# Altium PCB Espectrometro_V2.PcbDoc
Units mm, origin at the board's own origin, x right, y up, seen from the top; angles counter-clockwise.
Board outline 100 x 100 mm, 2 copper layers (Top Layer, Bottom Layer); 18 components, 24 nets, 155 pads, 0 vias.
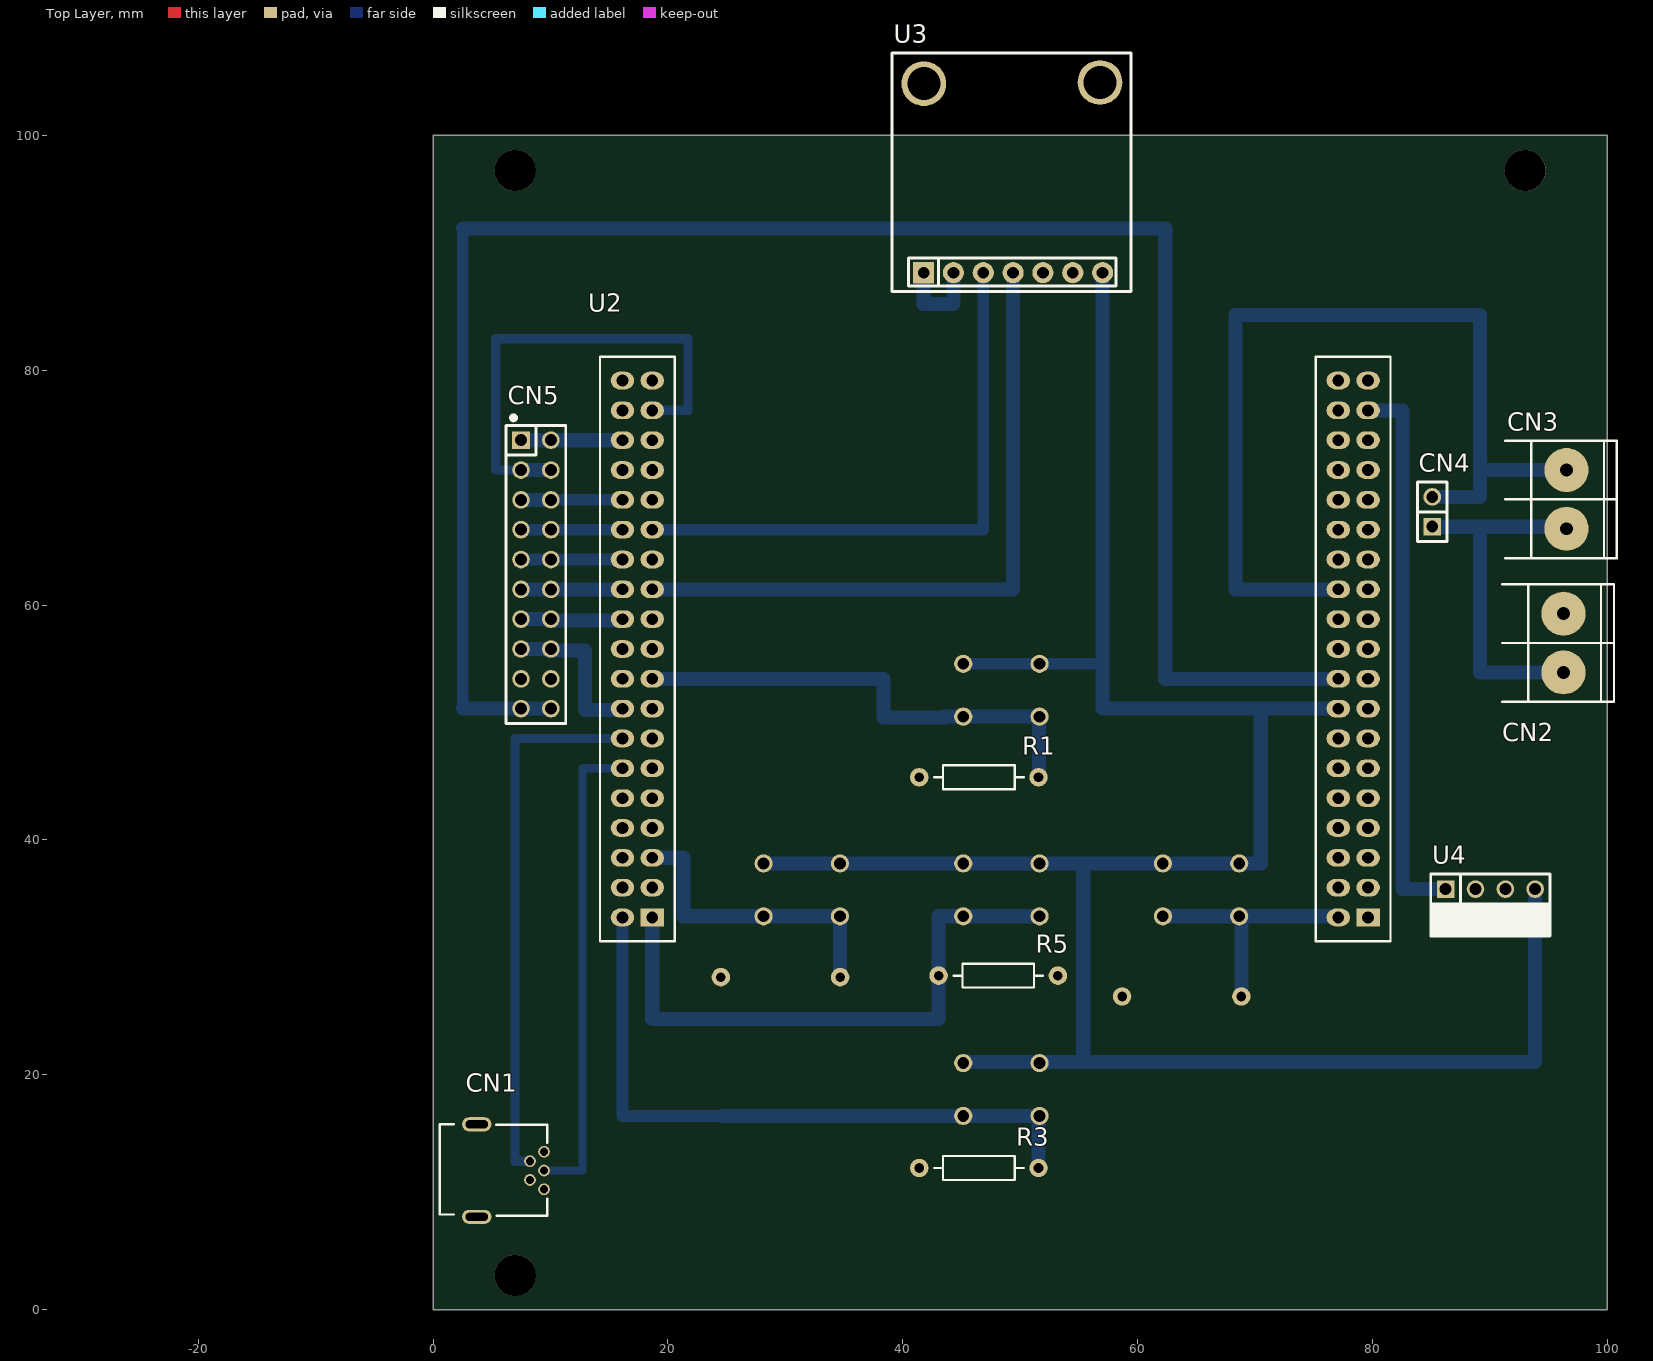
[diagram p0: Top Layer view]
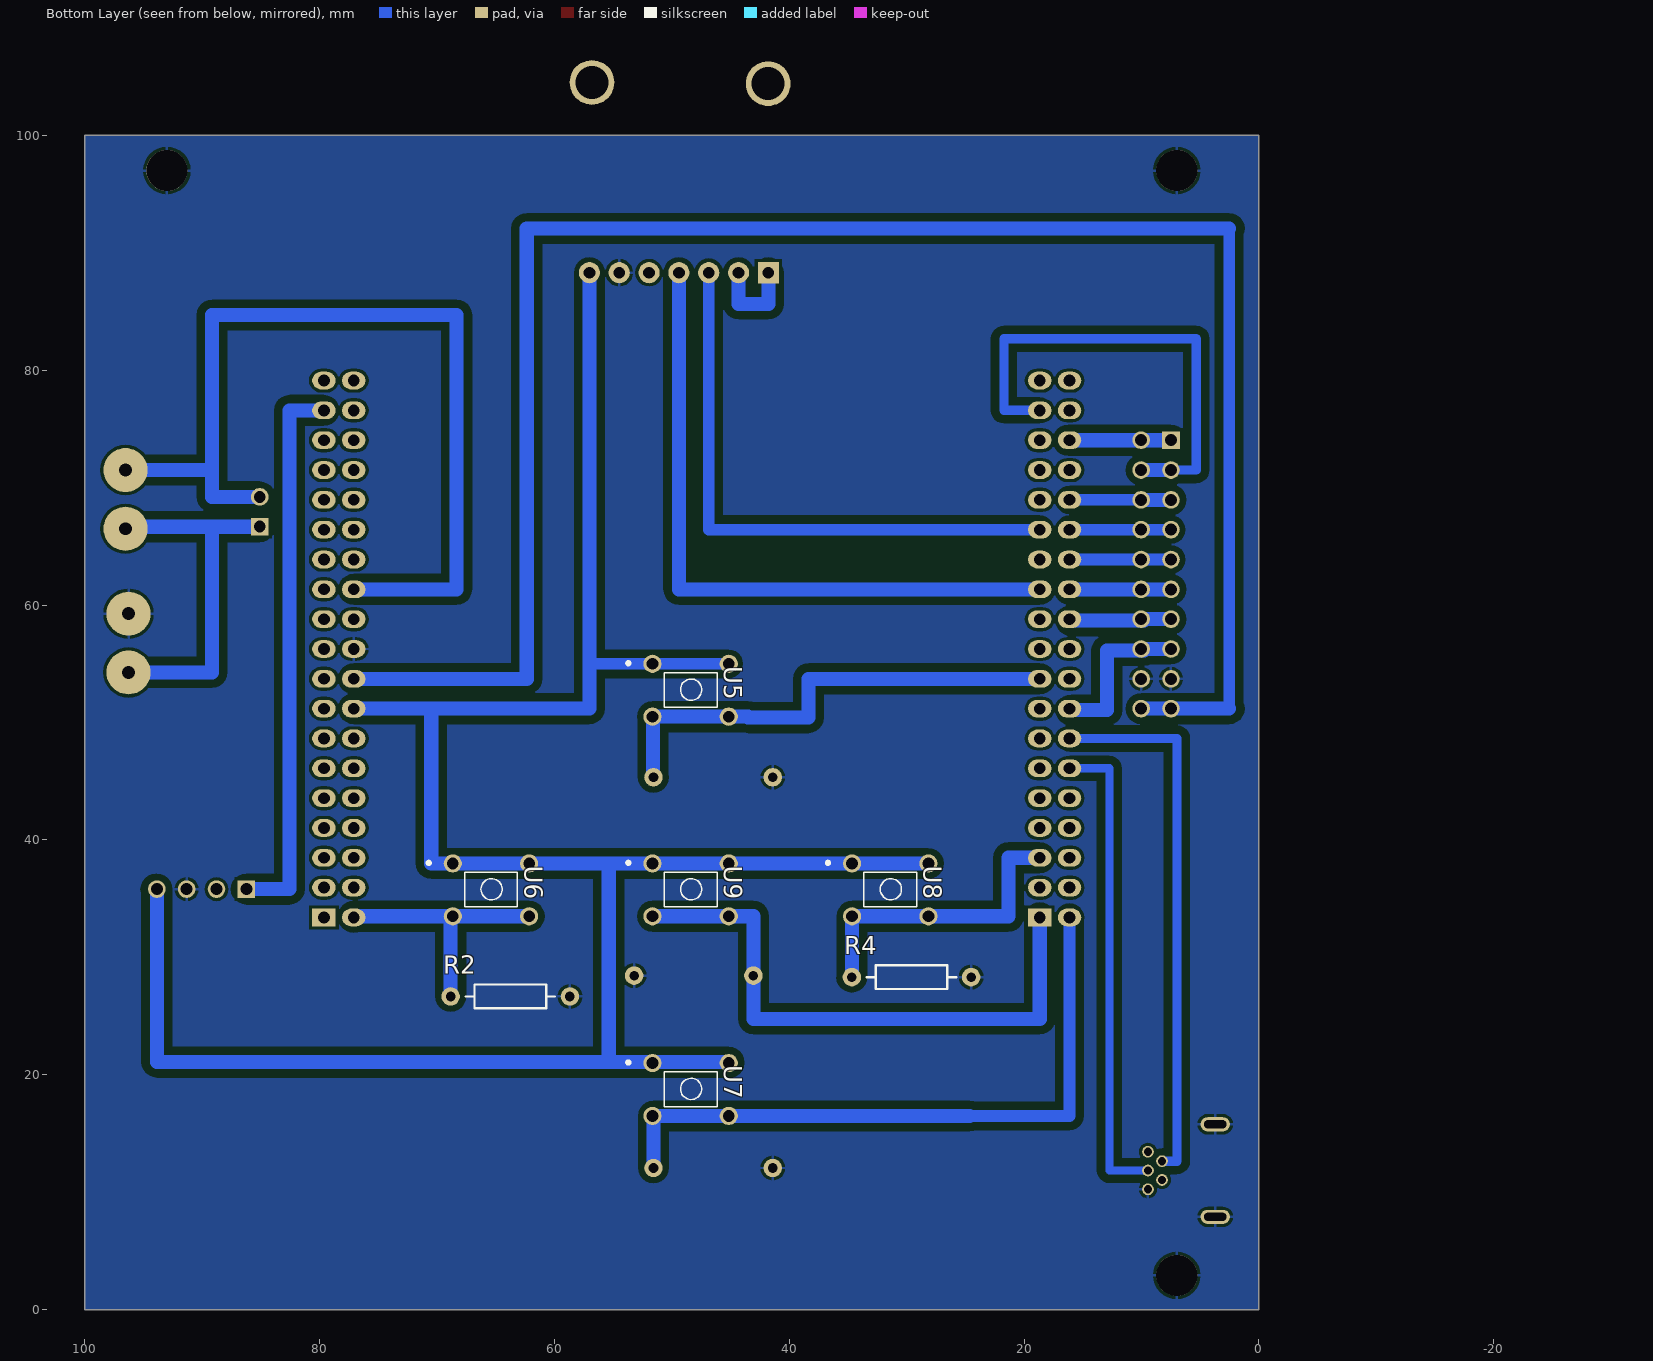
[diagram p1: Bottom Layer view, seen from below]

## Layer stack, top to bottom
Top Solder: solder mask 0.0102, Solder Resist, Dk 3.5
Top Layer: signal copper 0.0356
Dielectric 1: dielectric 0.32, FR-4, Dk 4.8
Bottom Layer: signal copper 0.0356
Bottom Solder: solder mask 0.0102, Solder Resist, Dk 3.5

## Board outline
0,0 0,100 100,100 100,0

## Design rules (kind name [scope] priority, off if disabled: settings)
Clearance [All] p1: gap=0.254 ignorepadtopadclearanceinfootprint=FALSE except(0: SMDPad-Hole THPad-Hole Via-Hole Fill-Hole Poly-Hole Region-Hole Text-Hole; 0.3: Arc-Hole Track-Hole; 0.4: Arc-Arc Arc-Track Track-Track; 0.7: Arc-Poly Track-Poly)
PolygonConnect [All] p1: connectstyle=Relief reliefconductorwidth=0.254 reliefentries=4 polygonreliefangle="90 Angle" airgapwidth=0.254
RoutingVias [All] p1: holewidth=0.711 width=1.27 viastyle="Through Hole" minholewidth=0.711 minwidth=1.27 maxholewidth=0.711 maxwidth=1.27
SolderMaskExpansion [All] p1: expansion=0.102 istentingtop=FALSE
Width [All] p1: maxlimit=1.5 minlimit=0.254 preferedwidth=1 toplayer_maxwidth=0.254 toplayer_prefwidth=0.254 bottomlayer_minwidth=0.5 minimp=50.000000 maximp=50.000000 favimp=50.000000
30 further rules are at their usual default settings.

## Classes and differential pairs
component class Perifericos: CN1 R1 R2 R3 R4 R5 U3 U4 U5 U6 U7 U8 U9
component class NUCLEO: CN2 CN3 CN4 CN5 U2

## Components (designator, comment, footprint, x,y, rotation, side; value= is the part's Value field where it differs from the comment)
CN1 "Conector Micro USB" C8320-05BFRIB0R 9.455,13.449 r270 top
CN2 "Bornera" "TERMINAL BLOCK DG306 - D5mm - 02P" 96.266,56.769 r180 top
CN3 "Amperimetro" "TERMINAL BLOCK DG306 - D5mm - 02P" 96.52,69.001 r180 top
CN4 "Jumper" "HEADER_M-2x1_0.1\"_V" 85.09,67.945 r90 top
CN5 "Conector_10P" "HEADER_M-10x2_0.1\"_V" 8.763,62.611 r270 top
R1 "2K2 %5" R_400 51.562,45.339 r180 top
R2 "2K2 %5" R_400 68.834,26.67 r180 bottom locked
R3 "2K2 %5" R_400 51.562,12.065 r180 top locked
R4 "2K2 %5" R_400 34.671,28.321 r180 bottom locked
R5 "2K2 %5" R_400 43.053,28.448 r0 top locked
U2 "NUCLEO STM32F446RE" "NUCLEO - STM32F446RE - UP" 79.629,79.121 r180 top locked
U3 "TC34725" TC34725 39.099,86.706 r0 top
U4 "LDR" "HEADER_M-4x1_0.1\"_H" 90.043,35.814 r0 top
U5 "Pulsadores" "Tact Switch TH" 51.651,55 r180 bottom locked
U6 "Pulsadores" "Tact Switch TH" 68.651,38 r180 bottom locked
U7 "Pulsadores" "Tact Switch TH" 51.651,21 r180 bottom locked
U8 "Pulsadores" "Tact Switch TH" 34.651,38 r180 bottom locked
U9 "Pulsadores" "Tact Switch TH" 51.651,38 r180 bottom locked

## Footprints (in the part's own frame and the unit in brackets; to place one, negate y for a bottom-side part, rotate by r counter-clockwise, add the part's x,y. Pads: shape width x height; smd on the part's side, far side on the other; paste and mask are expansions set on the pad)
C8320-05BFRIB0R [mm] "Conector Hembra MINI USB - B - THT"
  round 1 hole 0.7: 1(0,0) 2(0.8,-1.2) 3(1.6,0) 4(2.4,-1.2) 5(3.2,0)
  oval 1.2x2.5 hole 0.7 slot 1.9 at 90 deg: 5(-2.34,-5.73) 5(5.54,-5.73)
  silkscreen extent -2.35,-8.88 5.44,0.28, body extent -2.25,-8.88 5.45,0.32, height 4
"HEADER_M-2x1_0.1\"_V" [mm] "Tira de pines 2 vias. Paso de 2.54mm"
  rect 1.5x1.5 hole 1.016: 1(-1.27,0)
  round 1.5 hole 1.016: 2(1.27,0)
  silkscreen extent -2.54,-1.27 2.54,1.27, body extent -2.54,-1.24 2.54,1.24, height 8.54
"HEADER_M-4x1_0.1\"_H" [mm] "Tira de pines 4x1. Paso de 2.54mm. Horizontal."
  rect 1.5x1.5 hole 1.016: 1(-3.81,0)
  round 1.5 hole 1.016: 2(-1.27,0) 3(1.27,0) 4(3.81,0)
  silkscreen extent -5.08,-4 5.08,1.27, body extent -5.08,-9.94 5.08,0.29, height 3.76
"HEADER_M-10x2_0.1\"_V" [mm] "Tira de pines 10x2. Paso de 2.54mm"
  rect 1.5x1.5 hole 1.016: 1(-11.43,-1.27)
  round 1.5 hole 1.016: 1(-11.43,1.27) 2(-8.89,-1.27) 2(-8.89,1.27) 3(-6.35,-1.27) 3(-6.35,1.27) 4(-3.81,-1.27) 4(-3.81,1.27) 5(-1.27,1.27) 5(-1.27,-1.27) 6(1.27,1.27) 6(1.27,-1.27) 7(3.81,-1.27) 7(3.81,1.27) 8(6.35,-1.27) 8(6.35,1.27) 9(8.89,-1.27) 9(8.89,1.27) 10(11.43,-1.27) 10(11.43,1.27)
  silkscreen extent -13.59,-2.54 12.7,2.54, body extent -12.69,-2.57 12.71,2.51, height 10.1
"NUCLEO - STM32F446RE - UP" [mm] "NUCLEO - STM32F446RE - UP"
  rect 2x1.5 hole 1: 1(0,45.72) 39(60.96,45.72)
  oval 2x1.5 hole 1: 2(2.54,45.72) 3(0,43.18) 4(2.54,43.18) 5(0,40.64) 6(2.54,40.64) 7(0,38.1) 8(2.54,38.1) 9(0,35.56) 10(2.54,35.56) 11(0,33.02) 12(2.54,33.02) 13(0,30.48) 14(2.54,30.48) 15(0,27.94) 16(2.54,27.94) 17(0,25.4) 18(2.54,25.4) 19(0,22.86) 20(2.54,22.86) 21(0,20.32) 22(2.54,20.32) 23(0,17.78) 24(2.54,17.78) 25(0,15.24) 26(2.54,15.24) 27(0,12.7) 28(2.54,12.7) 29(0,10.16) 30(2.54,10.16) 31(0,7.62) 32(2.54,7.62) 33(0,5.08) 34(2.54,5.08) 35(0,2.54) 36(2.54,2.54) 37(0,0) 38(2.54,0) 40(63.5,45.72) 41(60.96,43.18) 42(63.5,43.18) 43(60.96,40.64) 44(63.5,40.64) 45(60.96,38.1) 46(63.5,38.1) 47(60.96,35.56) 48(63.5,35.56) 49(60.96,33.02) 50(63.5,33.02) 51(60.96,30.48) 52(63.5,30.48) 53(60.96,27.94) 54(63.5,27.94) 55(60.96,25.4) 56(63.5,25.4) 57(60.96,22.86) 58(63.5,22.86) 59(60.96,20.32) 60(63.5,20.32) 61(60.96,17.78) 62(63.5,17.78) 63(60.96,15.24) 64(63.5,15.24) 65(60.96,12.7) 66(63.5,12.7) 67(60.96,10.16) 68(63.5,10.16) 69(60.96,7.62) 70(63.5,7.62) 71(60.96,5.08) 72(63.5,5.08) 73(60.96,2.54) 74(63.5,2.54) 75(60.96,0) 76(63.5,0)
  silkscreen extent -1.91,-2.03 65.41,47.75, body extent -3.32,-5.08 66.68,78.87, height 22.28
R_400 [mil] "resistance THT 1/4W. Vertical."
  round 62 hole 32: 1(0,0) 2(400,0)
  silkscreen extent 50,-40 350,40, body extent -12,-45 412,46, height 96
"Tact Switch TH" [mm] "Tact Swtitch, 6x6mm, TH"
  round 1.55 hole 1: 1(0,0) 2(6.5,0) 3(0,-4.5) 4(6.5,-4.5)
  silkscreen extent -2.19,-3.7 5.5,0.19
TC34725 [mm] "TC34725 Sensor RGB"
  rect 1.8x1.8 hole 1: 1(2.68,1.6)
  round 1.8 hole 1: 2(5.22,1.6) 3(7.76,1.6) 4(10.3,1.6) 5(12.84,1.6) 6(15.38,1.6) 7(17.92,1.6)
  round 3.81 hole 2.794: 15(17.7,17.8) 16(2.7,17.7)
  silkscreen extent 0,0 20.32,20.3
"TERMINAL BLOCK DG306 - D5mm - 02P" [mm] "Bornera con Tornillos 5mm separación. / 250V 15A."
  round 3.75 hole 1.1: 1(0,2.5) 2(0,-2.5)
  silkscreen extent -4.3,-5 5.2,5, body extent -3.1,-5 4.5,5.6, height 10

## Part data
CN1: "Conector Micro USB Type B"
CN2: library part Conector_2P, "Conector 2 Vias"
CN3: library part Conector_2P_Amp, "Conector 2 Vias"
CN4: library part Conector_2P
CN5: "Conector 10 Vias"
R1 R2 R3 R4 R5: library part Resistencia, "Resistor", Author="Franco Mendez", Footprint Version=v1.0
U3: "Sensor RGB"
U4: "Sensor LDR para medir Int.Luz"
U5 U6 U7 U8 U9: "Tact Switch"

## Free pads (board coordinates)
  round 3.5 hole 3.5: 20(7,2.921) 20(7,97) 20(93,97)

## Nets (pads, with @x,y where several pads share a name; then routed paths per layer and width w, separated by ;. In a path a pad name is that pad's centre, name@x,y a point inside that pad or via, vN(x,y) a via of type N, cw(c..) or ccw(c..) an arc to the next point about the centre after c; other vN are vias at no path point)
+3.3V: U2.16 U3.7 U4.4 U5.1 U5.2 U6.1 U6.2 U7.1 U7.2 U8.1 U8.2 U9.1 U9.2 | length 205.1
  Bottom Layer w1: U5.2 U5.1 57.019,55 57.019,54.864
  Bottom Layer w1.2: U8.2 U8.1 U9.2 U9.1 55.372,38 ; U7.2 45.151,21.082 55.372,21.082 ; 57.019,54.864 57.019,51.181 70.485,51.181 ; 57.019,55 U3.7 ; U2.16 70.485,51.181 ; U4.4@93.934,35.814 U4.4 93.853,21.082 55.372,21.082 ; 55.372,21.082 55.372,38 ; 55.372,38 U6.2 U6.1 70.485,38 70.485,51.181
+5V: CN5.10 U2.18 | length 161.3
  Bottom Layer w1: 2.54,51.181 2.54,92.075
  Bottom Layer w1.2: 2.54,51.181 7.493,51.181 CN5.10@10.033,51.181 ; 2.54,92.075 62.357,92.075 62.357,53.721 U2.18
ADC_Luz: U2.35 U4.1 | length 47.4
  Bottom Layer w1.2: U2.35 82.55,76.581 82.55,35.814 U4.1
DOWN: R3.1 U2.40 U7.3 U7.4 | length 56.8
  Bottom Layer w1: U2.40 16.129,16.5 24.638,16.5
  Bottom Layer w1.2: 24.638,16.5 U7.4 51.562,16.5 R3.1
Espect_SCL: U2.61 U3.4 | length 57.7
  Bottom Layer w1.2: U2.61 49.399,61.341 U3.4
Espect_SDA: U2.65 U3.3 | length 50.1
  Bottom Layer w1: U2.65 46.859,66.421 U3.3
GND: CN1.5 CN2.2 CN5.9 pad.20 R1.2 R2.2 R3.2 R4.2 R5.2 U2.20 U3.6 U4.3
LEFT: R2.1 U2.2 U6.3 U6.4 | length 21.9
  Bottom Layer w1.2: U6.4 U6.3 U6.3@68.834,33.5 ; R2.1 U6.3@68.834,33.5 ; U2.2 77.089,33.5 U6.3@68.834,33.5
NetCN2_1: CN2.1 CN3.1 CN4.1 | length 31.4
  Bottom Layer w1.2: CN4.1 89.154,66.675 ; CN2.1 89.154,54.269 89.154,66.675 ; 89.154,66.675 CN3.1@96.346,66.675 ; CN3.1@96.346,66.675 96.52,66.675 CN3.1 CN3.1@96.346,66.675
NetU3_1: U3.1 U3.2 | length 7.9
  Bottom Layer w1.2: U3.1 41.779,85.639 44.319,85.639 U3.2
OK: R5.1 U2.39 U9.3 U9.4 | length 50.4
  Bottom Layer w1.2: U2.39 18.669,24.765 43.053,24.765 R5.1 43.053,33.5 U9.4 U9.3
RIGHT: R4.1 U2.43 U8.3 U8.4 | length 26.2
  Bottom Layer w1.2: U2.43 21.336,38.481 21.336,33.5 U8.4 U8.3 34.661,33.49 34.661,28.331 R4.1
SCK: CN5.3 U2.68 | length 8.6
  Bottom Layer w1: CN5.3@10.033,68.961 U2.68
  Bottom Layer w1.2: CN5.3@7.493,68.961 CN5.3@10.033,68.961
SD_CS: CN5.1 U2.72 | length 8.8
  Bottom Layer w1.2: CN5.1@7.493,74.041 10.033,74.041 U2.72 U2.72@16.256,74.041
SDI: CN5.5 U2.64 | length 8.6
  Bottom Layer w1: CN5.5@7.493,63.881 10.033,63.881 U2.64
SDO: CN5.4 U2.66 | length 8.6
  Bottom Layer w1: CN5.4@7.493,66.421 10.033,66.421 U2.66
TFT_CS: CN5.8 U2.54 | length 13.8
  Bottom Layer w1.2: CN5.8@7.493,56.261 CN5.8@10.033,56.261 ; CN5.8@9.779,56.134 12.954,56.134 12.954,51.054 U2.54@16.002,51.054
TFT_DC: CN5.6 U2.62 | length 8.6
  Bottom Layer w1.2: CN5.6@7.493,61.341 10.033,61.341 U2.62
TFT_LED: CN5.2 U2.73 | length 41.4
  Bottom Layer w0.8: CN5.2@7.493,71.501 5.334,71.501 5.334,82.677 20.574,82.677 21.717,82.677 21.717,76.581 U2.73
  Bottom Layer w1.2: CN5.2@7.493,71.501 CN5.2@10.033,71.501
TFT_RST: CN5.7 U2.60 | length 8.8
  Bottom Layer w1.2: CN5.7@7.493,58.801 CN5.7@10.033,58.801 ; CN5.7@9.779,58.674 U2.60@16.002,58.674
UP: R1.1 U2.55 U5.3 U5.4 | length 41.6
  Bottom Layer w1.2: U2.55 38.354,53.721 38.354,50.419 43.5,50.419 43.5,50.5 U5.4 50,50.5 U5.3 51.606,50.455 51.606,45.383 R1.1
USB_Minus: CN1.2 U2.52 | length 46.4
  Bottom Layer w0.8: CN1.2 6.985,12.649 6.985,48.641 U2.52
USB_Plus: CN1.3 U2.50 | length 40.9
  Bottom Layer w0.7: CN1.3 12.738,11.849 12.738,46.101 U2.50
VIN: CN3.2 CN4.2 U2.24 | length 79.9
  Bottom Layer w1.2: U2.24 68.326,61.341 68.326,84.709 89.154,84.709 89.154,71.501 ; CN4.2 89.154,69.215 89.154,71.501 ; CN3.2 89.154,71.501
pads on no net: CN1.1 CN1.4 U2.1 U2.3 U2.4 U2.5 U2.6 U2.7 U2.8 U2.9 U2.10 U2.11 U2.12 U2.13 U2.14 U2.15 U2.17 U2.19 U2.21 U2.22 U2.23 U2.25 U2.26 U2.27 U2.28 U2.29 U2.30 U2.31 U2.32 U2.33 U2.34 U2.36 U2.37 U2.38 U2.41 U2.42 U2.44 U2.45 U2.46 U2.47 U2.48 U2.49 U2.51 U2.53 U2.56 U2.57 U2.58 U2.59 U2.63 U2.67 U2.69 U2.70 U2.71 U2.74 U2.75 U2.76 U3.5 U3.15 U3.16 U4.2

## Polygon pours and split planes (outlines as drawn)
GND on Bottom Layer "GND" (solid, remove dead copper, pour order 0): 0,99.949 99.949,99.949 99.949,0 0,0

## Other copper
Bottom Layer:
  pour cut-out: -30.48,76.835

## Silkscreen, mask and mechanical layers (free items; w line width, h text height)
Mechanical 1:
  lines w0.127: 0.127,0 0,0 ; 0,0 0,100 100,100 100,0 0,0